# Altium PCB PCB.PcbDoc
Units mm, origin at the board's own origin, x right, y up, seen from the top; angles counter-clockwise.
Board outline 53.47 x 68.58 mm, 2 copper layers (Top Layer, Bottom Layer); 57 components, 52 nets, 216 pads, 0 vias.
Unrouted connection lines stored in the file: 149.
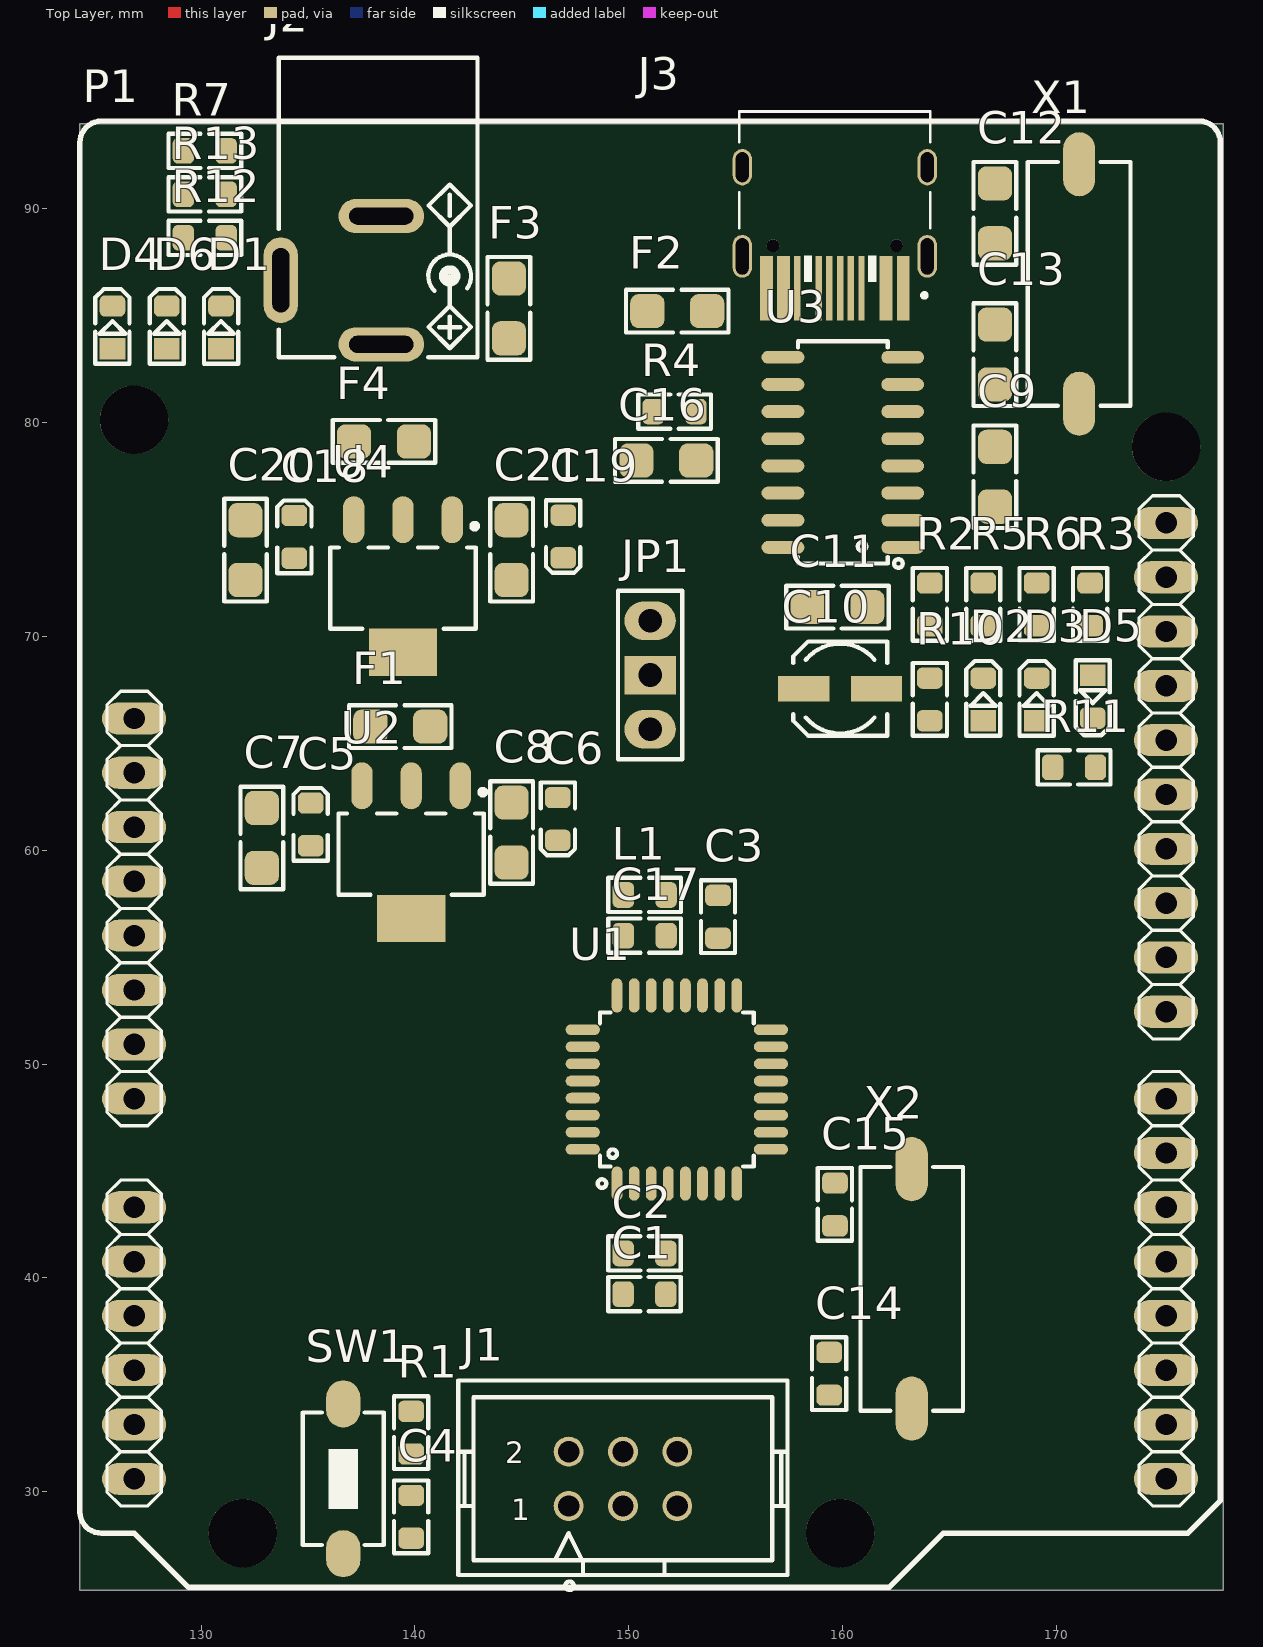
[diagram p0: Top Layer view]
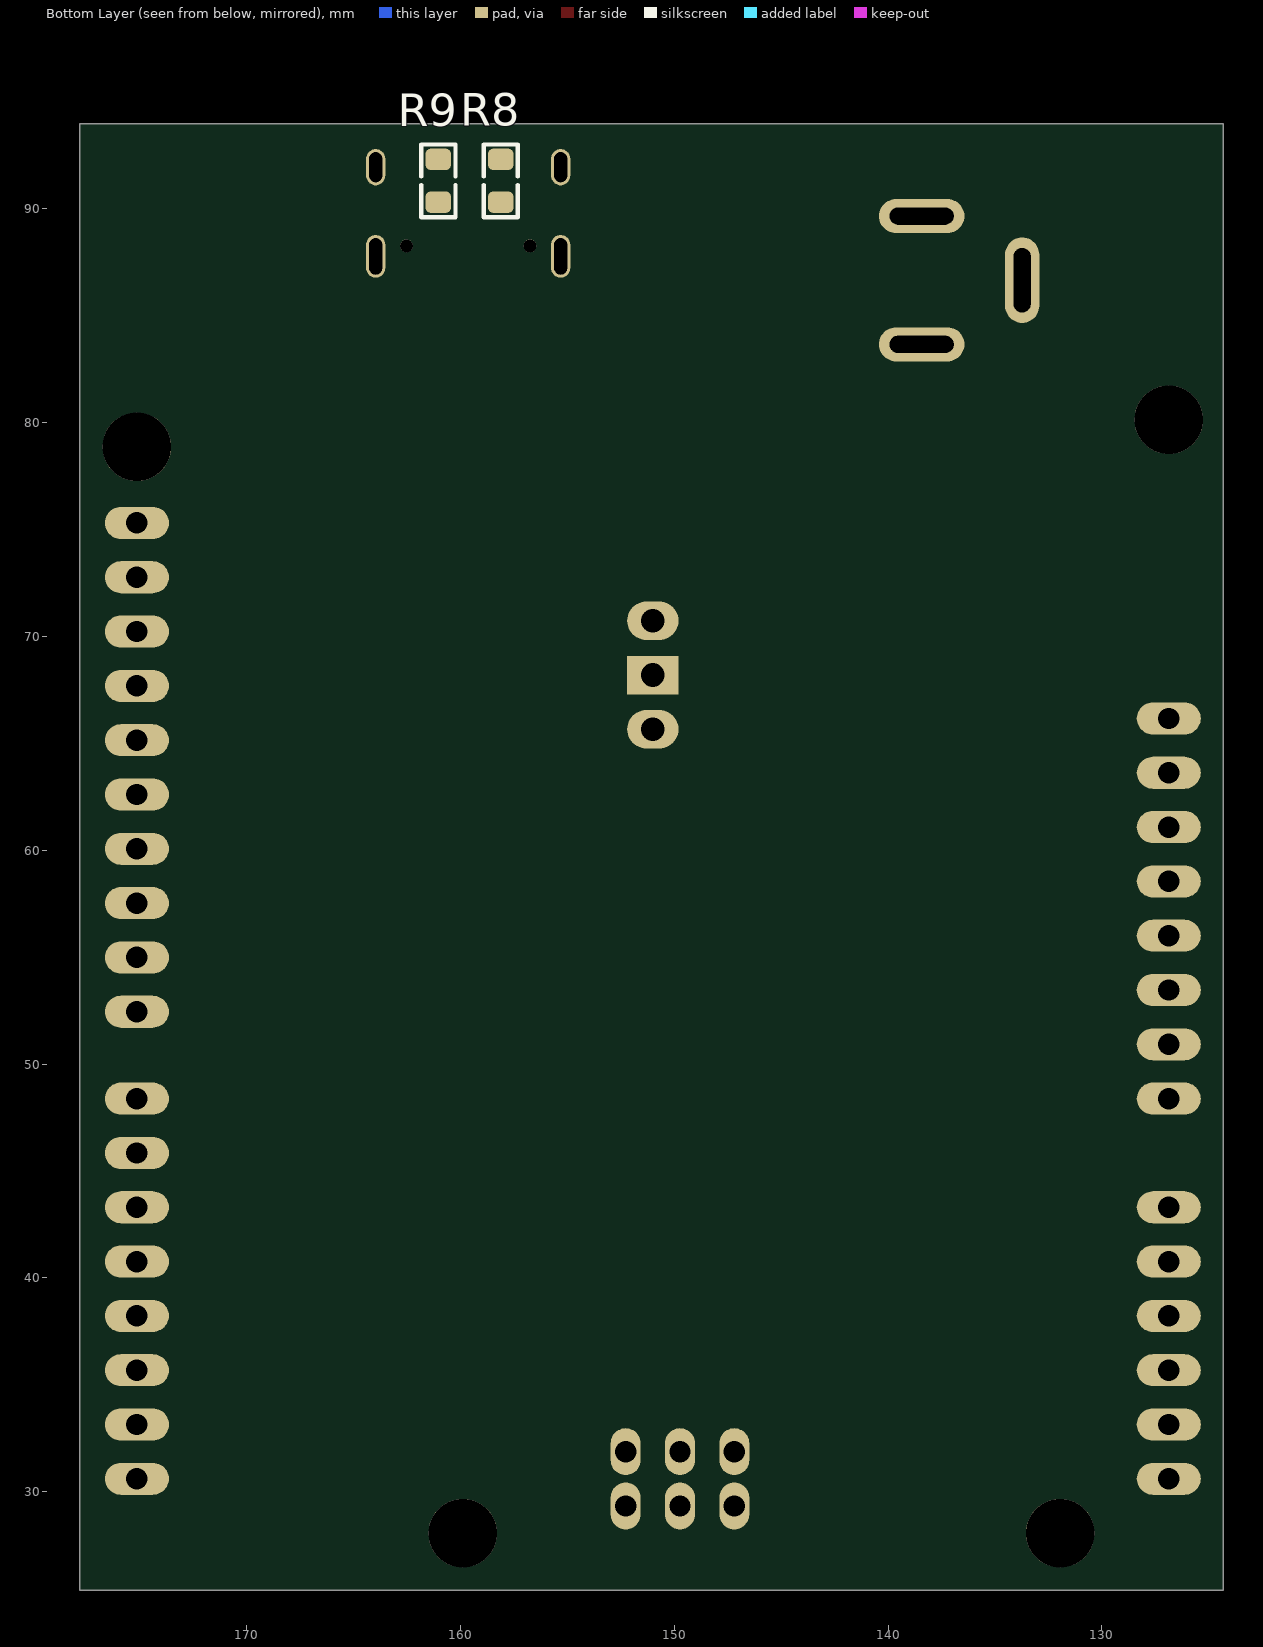
[diagram p1: Bottom Layer view, seen from below]

## Layer stack, top to bottom
Top Solder: solder mask 0.0102, Solder Resist, Dk 3.5
Top Layer: signal copper 0.0356
Dielectric 1: dielectric 0.32, FR-4, Dk 4.8
Bottom Layer: signal copper 0.0356
Bottom Solder: solder mask 0.0102, Solder Resist, Dk 3.5

## Board outline
124.333,25.4 177.8,25.4 177.8,93.98 124.333,93.98

## Design rules (kind name [scope] priority, off if disabled: settings)
Clearance [All] p1: gap=0.127 ignorepadtopadclearanceinfootprint=FALSE
ComponentClearance [All] p1 off: gap=0.254 collisioncheckmode=3 verticalgap=0.254 showdistances=FALSE
PolygonConnect [All] p1: connectstyle=Relief reliefconductorwidth=0.254 reliefentries=4 polygonreliefangle="90 Angle" airgapwidth=0.254
RoutingVias [All] p1: holewidth=0.711 width=1.27 viastyle="Through Hole" minholewidth=0.711 minwidth=1.27 maxholewidth=0.711 maxwidth=1.27
SolderMaskExpansion [All] p1: expansion=0.102 istentingtop=FALSE
Width [All] p1: maxlimit=0.254 minlimit=0.254 preferedwidth=0.254
29 further rules are at their usual default settings.

## Components (designator, comment, footprint, x,y, rotation, side; value= is the part's Value field where it differs from the comment)
C1 "100nF" C0805 150.741,39.243 r0 top
C2 "100nF" C0805 150.741,41.148 r0 top
C3 "100nF" C0805 154.178,56.896 r270 top
C4 "100nF" C0805 139.827,28.829 r90 top
C5 "10uF" C_TN_2012 135.128,61.214 r270 top
C6 "22uF" C_TN_2012 146.685,61.468 r90 top
C7 "100nF" C1206 132.842,60.579 r90 top
C8 "100nF" C1206 144.526,60.833 r270 top
C9 "10nF" C1206 167.132,77.47 r90 top
C10 "10uF" C_EL_D4L5 159.893,67.564 r0 top
C11 "100nF" C1206 159.766,71.374 r180 top
C12 "22pF" C1206 167.132,89.789 r270 top
C13 "22pF" C1206 167.132,83.185 r90 top
C14 "22pF" C0805 159.377,35.524 r90 top
C15 "22pF" C0805 159.646,43.439 r270 top
C16 "100nF" C1206 151.762,78.232 r0 top
C17 "100nF" C0805 150.749,56.007 r0 top
C18 "10uF" C_TN_2012 134.366,74.66 r270 top
C19 "22uF" C_TN_2012 146.939,74.676 r90 top
C20 "100nF" C1206 132.08,74.041 r90 top
C21 "100nF" C1206 144.526,74.041 r270 top
D1 "LED805YLW" LED0805YLW 130.937,84.455 r90 top
D2 "RED" LED0805RED 166.582,67.056 r90 top
D3 "RED" LED0805RED 169.079,67.056 r90 top
D4 "LED805GRN" LED0805GRN 125.857,84.455 r90 top
D5 "LED805GRN" LED0805GRN 171.704,67.183 r270 top
D6 "LED805RED" LED0805RED 128.397,84.455 r90 top
F1 "FUSE3A_1206" F1206 139.319,65.786 r180 top
F2 "500mA" F1206 152.273,85.217 r180 top
F3 "FUSE3A_1206" F1206 144.399,85.344 r270 top
F4 "FUSE3A_1206" F1206 138.557,79.121 r180 top
J1 "CONN_ISP" IDC_2X3 149.733,30.607 r0 top
J2 "DC_POWER_JACK" JAC_PWR2 138.43,83.662 r0 top
J3 "12b" "HRO_TYPE-C-31-M-12 - Extended" 159.639,91.948 r180 top
JP1 "0b" "jumper selector" 151.003,70.739 r270 top
L1 "100nH" L0805 150.749,57.912 r0 top
P1 "UNO" ARDUINO_UNO_CONNECTOR 126.873,80.137 r270 top locked
R1 "10K" R0805 139.827,32.766 r270 top
R2 "1K" R0805 164.084,71.501 r270 top
R3 "1K" R0805 171.577,71.501 r270 top
R4 "10K" R0805 152.146,80.518 r0 top
R5 "680b" R0805 166.582,71.501 r270 top
R6 "680b" R0805 169.079,71.501 r270 top
R7 "220b" R0805 130.175,92.71 r180 top
R8 "4.7K" R0805 158.115,91.313 r270 bottom
R9 "4.7K" R0805 161.036,91.313 r270 bottom
R10 "1.8K" R0805 164.084,67.056 r90 top
R11 "1k" R0805 170.831,63.881 r0 top
R12 "1.8k" R0805 130.175,88.646 r180 top
R13 "680b" R0805 130.175,90.678 r180 top
SW1 "PUSHBUTTON" SWPBS_SPST_6X3X2 136.652,30.607 r90 top
U1 "ATMEGA328" QFG80_32 152.254,48.813 r90 top
U2 "LD1117" SOT223_4 139.827,59.817 r270 top
U3 "CH340G" SO_16 160.014,78.613 r180 top
U4 "LD1117" SOT223_4 139.446,72.263 r270 top
X1 "12MHz" XTL_2_11X5 171.069,86.487 r270 top
X2 "16MHz" XTL_2_11X5 163.239,39.488 r90 top

## Footprints (in the part's own frame and the unit in brackets; to place one, negate y for a bottom-side part, rotate by r counter-clockwise, add the part's x,y. Pads: shape width x height; smd on the part's side, far side on the other; paste and mask are expansions set on the pad)
ARDUINO_UNO_CONNECTOR [mm] "Arduino Uno Connector"
  oval 1.5x3 hole 1: AD1(36.83,0) AD2(39.37,0) AD3(41.91,0) AD4(44.45,0) AD5(46.99,0) AD6(49.53,0) IOH1(27.686,48.26) IOH2(25.146,48.26) IOH3(22.606,48.26) IOH4(20.066,48.26) IOH5(17.526,48.26) IOH6(14.986,48.26) IOH7(12.446,48.26) IOH8(9.906,48.26) IOH9(7.366,48.26) IOH10(4.826,48.26) IOL1(49.53,48.26) IOL2(46.99,48.26) IOL3(44.45,48.26) IOL4(41.91,48.26) IOL5(39.37,48.26) IOL6(36.83,48.26) IOL7(34.29,48.26) IOL8(31.75,48.26) POW1(13.97,0) POW2(16.51,0) POW3(19.05,0) POW4(21.59,0) POW5(24.13,0) POW6(26.67,0) POW7(29.21,0) POW8(31.75,0)
  round 3.2 hole 3.2: H1(0,0) H2(52.07,5.08) H3(52.07,33.02) H4(1.27,48.26)
  silkscreen extent -13.97,-2.54 54.61,50.8, body extent 3.31,-1.15 51.13,49.54, height 8.55
C0805 [mm] "CHIP Capacitor, 2.0X1.3mm, 0805"
  rrect50% 1x1.2 smd paste-0.1 mask+0.075: 1(-1,0) 2(1,0)
  Top Layer pour cut-out: -0.5,0.8 0.5,0.8 0.5,-0.8 -0.5,-0.8
  silkscreen extent -1.7,-0.8 1.7,0.8, body extent -1,-0.62 1,0.63, height 1
C1206 [mm] "CHIP Capacitor, 3.2X1.6mm, 1206"
  rrect50% 1.6x1.6 smd paste-0.8 mask+0.075: 1(-1.4,0) 2(1.4,0)
  Top Layer pour cut-out: -0.8,1 -0.8,-1 0.8,-1 0.8,1
  silkscreen extent -2.4,-1 2.4,1, body extent -1.6,-0.8 1.6,0.8, height 1
C_EL_D4L5 [mm] "Electrolytic Cap, D: 4.3mm, Size B, 5.5mm Height"
  rect 2.4x1.2 smd paste-0.129: 1(-1.7,0) 2(1.7,0)
  Top Layer pour cut-out: 1.397,2.032 1.397,-2.032 -1.651,-2.032 -1.651,2.032
  silkscreen extent -2.2,-2.2 2.2,2.2, body extent -2.5,-2.15 2.5,2.15, height 5.5
C_TN_2012 [mm] "CAPACITOR, TAN N, TAN P, TAN R, 0805P, 2X1.3mm"
  rrect50% 1x1.2 smd paste-0.089 mask+0.075: 1(-1,0) 2(1,0)
  Top Layer pour cut-out: -0.5,0.8 0.5,0.8 0.5,-0.8 -0.5,-0.8
  silkscreen extent -1.7,-0.8 1.7,0.8, body extent -1.04,-0.69 1.21,0.66, height 1.35
F1206 [mm] "FUSE, 1206, 3.2x1.6mm"
  rrect50% 1.6x1.6 smd paste-2 mask+0.075: 1(-1.4,0) 2(1.4,0)
  Top Layer pour cut-out: -0.8,1 -0.8,-1 0.8,-1 0.8,1
  silkscreen extent -2.4,-1 2.4,1, body extent -1.6,-0.8 1.6,0.8, height 1
"HRO_TYPE-C-31-M-12 - Extended" [mm]
  rect 0.6x3 smd mask+0.05: A1_B12(-3.2,5.664) A4_B9(-2.4,5.664) B1_A12(3.2,5.664) B4_A9(2.4,5.664)
  rect 0.3x3 smd mask+0.05: A5(-1.25,5.664) A6(-0.25,5.664) A7(0.25,5.664) B5(1.75,5.664) B6(0.75,5.664) B7(-0.75,5.664)
  oval 0.9x2 hole 0.6 slot 1.7 at 90 deg: S1(-4.325,4.17) S2(4.325,4.17)
  oval 0.9x1.7 hole 0.6 slot 1.4 at 90 deg: S3(-4.325,0) S4(4.325,0)
  round 0.6 hole 0.6 unplated: ""(-2.89,3.68) ""(2.89,3.68)
  silkscreen extent -4.47,-2.6 4.47,6.09, body extent -4.47,-2.6 4.47,5.31, height 3.31
IDC_2X3 [mm]
  round 1.4 / inner round 1.4 / far side oval 1.4x2.2 hole 1 mask+0.1: 1(-2.54,-1.27) 2(-2.54,1.27) 3(0,-1.27) 4(0,1.27) 5(2.54,-1.27) 6(2.54,1.27)
  silkscreen extent -7.7,-5.2 7.7,4.6, body extent -7.64,-4.42 7.64,4.75, height 9.13
JAC_PWR2 [mm] "DC POWER JACK, Power Jack KLDX-0202"
  oval 4x1.6 hole 0.8 slot 3 at 0 deg: 1(0,0) 2(0,6)
  oval 1.6x4 hole 0.8 slot 3 at 90 deg: 3(-4.7,3)
  silkscreen extent -4.8,-0.6 4.5,13.4, body extent -4.9,-0.65 4.5,13.85, height 10.8
"jumper selector" [mm]
  oval 1.8x2.4 hole 1.1: 1(0,0) 3(5.08,0)
  rect 1.8x2.4 hole 1.1: 2(2.54,0)
  silkscreen extent -1.4,-1.5 6.48,1.5, body extent -1.24,-1.27 6.38,1.27, height 10.16
L0805 [mm] "INDUCTOR, FERRITE BEAD, 0805, 2.0X1.3mm"
  rrect50% 1x1.2 smd paste-0.1 mask+0.075: 1(-1,0) 2(1,0)
  Top Layer pour cut-out: -0.5,0.8 0.5,0.8 0.5,-0.8 -0.5,-0.8
  silkscreen extent -1.7,-0.8 1.7,0.8, body extent -1,-0.6 1,0.6, height 0.95
LED0805GRN [mm] "LED SMD 0805, GREEN"
  rect 1x1.2 smd paste-2 mask+0.075: 1(-1,0)
  rrect50% 1x1.2 smd paste-2 mask+0.075: 2(1,0)
  Top Layer pour cut-out: -0.5,0.8 0.5,0.8 0.5,-0.8 -0.5,-0.8
  silkscreen extent -1.7,-0.8 1.8,0.8, body extent -1,-0.63 1,0.63, height 0.7
LED0805RED [mm] "LED SMD 0805, RED"
  rect 1x1.2 smd paste-2 mask+0.075: 1(-1,0)
  rrect50% 1x1.2 smd paste-2 mask+0.075: 2(1,0)
  Top Layer pour cut-out: -0.5,0.8 0.5,0.8 0.5,-0.8 -0.5,-0.8
  silkscreen extent -1.7,-0.8 1.8,0.8, body extent -1,-0.63 1,0.63, height 0.7
LED0805YLW [mm] "LED SMD 0805, YELLOW"
  rect 1x1.2 smd paste-2 mask+0.075: 1(-1,0)
  rrect50% 1x1.2 smd paste-2 mask+0.075: 2(1,0)
  Top Layer pour cut-out: -0.5,0.8 0.5,0.8 0.5,-0.8 -0.5,-0.8
  silkscreen extent -1.7,-0.8 1.8,0.8, body extent -1,-0.63 1,0.63, height 0.7
QFG80_32 [mm] "TQFP32, A32 (Cypress), GP32 (Zarlink), MS-026ABA(JEDEC), 7X7mm, 0.8mm"
  oval 1.6x0.5 smd: 1(-4.4,2.8) 2(-4.4,2) 3(-4.4,1.2) 4(-4.4,0.4) 5(-4.4,-0.4) 6(-4.4,-1.2) 7(-4.4,-2) 8(-4.4,-2.8) 17(4.4,-2.8) 18(4.4,-2) 19(4.4,-1.2) 20(4.4,-0.4) 21(4.4,0.4) 22(4.4,1.2) 23(4.4,2) 24(4.4,2.8)
  oval 0.5x1.6 smd: 9(-2.8,-4.4) 10(-2,-4.4) 11(-1.2,-4.4) 12(-0.4,-4.4) 13(0.4,-4.4) 14(1.2,-4.4) 15(2,-4.4) 16(2.8,-4.4) 25(2.8,4.4) 26(2,4.4) 27(1.2,4.4) 28(0.4,4.4) 29(-0.4,4.4) 30(-1.2,4.4) 31(-2,4.4) 32(-2.8,4.4)
  silkscreen extent -4.6,-3.6 3.6,3.7, body extent -4.5,-4.5 4.5,4.5, height 1.6
R0805 [mm] "CHIP RESISTOR 1/8 WATT ,2.0X1.3mm, 0805, 2012"
  rrect50% 1x1.2 smd paste-0.1 mask+0.075: 1(-1,0) 2(1,0)
  Top Layer pour cut-out: -0.5,0.8 0.5,0.8 0.5,-0.8 -0.5,-0.8
  silkscreen extent -1.7,-0.8 1.7,0.8, body extent -1.15,-0.67 1.15,0.68, height 0.76
SO_16 [mm] "SOP, SOIC, 3.9mm width, 1.27mm pitch,"
  oval 2x0.6 smd: 1(-2.8,4.445) 2(-2.8,3.175) 3(-2.8,1.905) 4(-2.8,0.635) 5(-2.8,-0.635) 6(-2.8,-1.905) 7(-2.8,-3.175) 8(-2.8,-4.445) 9(2.8,-4.445) 10(2.8,-3.175) 11(2.8,-1.905) 12(2.8,-0.635) 13(2.8,0.635) 14(2.8,1.905) 15(2.8,3.175) 16(2.8,4.445)
  silkscreen extent -2.8,-5.2 2.1,5.4, body extent -3.1,-4.95 3.1,4.95, height 1.7
SOT223_4 [mm] "SOT223, 4-Leads, Body 6.5x3.5mm, Pitch 2.30mm"
  oval 2.2x1 smd: 1(-3.2,2.3) 2(-3.2,0) 3(-3.2,-2.3)
  rect 2.2x3.2 smd paste-5: 4(3,0)
  Top Layer pour cut-out: -1.7,3.556 1.7,3.556 1.7,-3.556 -1.7,-3.556
  silkscreen extent -3.02,-3.4 1.9,3.48, body extent -3.5,-3.25 3.5,3.25, height 1.7
SWPBS_SPST_6X3X2 [mm] "SWITCH, PUSHBUTTON, SMD, SPST, 6X3.5X2.5mm, RS-282G05A3, SKQYPA, 50000 Cycles"
  oval 2.2x1.6 smd mask+0.1: 1(-3.5,0) 2(3.5,0)
  silkscreen extent -3.1,-1.9 3.1,1.9, body extent -3.4,-1.86 3.4,1.86, height 2.5
XTL_2_11X5 [mm] "SMD crystal resonator, ABL, ABLS, HC-49, HC49 11X4.5MM"
  oval 3x1.5 smd: 1(-5.6,0) 2(5.6,0)
  silkscreen extent -5.7,-2.4 5.7,2.4, body extent -6.4,-2.41 6.4,2.42, height 4.3

## Part data
C1 C2 C3 C4 C14 C15 C17: library part CAP_SMD_MLCC_0805, "CAP, MLCC", ASSEMBLY=ASSEMBLY, MANF=-, MANF_P#=MANF_PART#, PARAM="-, -%", PARAM2=-V, PRICE="100= 1$"
C5 C6 C18 C19: library part CAP_SMD_TAN, "CAP, SMD, TAN", MANF=VISHAY, MANF_P#=T55A106M6R3C0300, PARAM="20%, 300mOhm, -55~105oC", PARAM2=6.3V, PRICE=0.46$
C7 C8 C20 C21: library part CAP_SMD_MLCC_1206, "CAP, MLCC", ASSEMBLY=ASSEMBLY, MANF=-, MANF_P#=MANF_PART#, PARAM="-, -%", PARAM2=-V, PRICE="100= 1$"
C9 C11 C12 C13 C16: library part CAP_SMD_FILM, "CAP, FILM, 680nF, 16V, Acryl, 20%, 1206", ASSEMBLY=ASSEMBLY, DESC=-, MANF=Murata, MANF_P#=-, PARAM="Acrylic, MetallizedStacked, 20%, -40~85oC", PARAM2=16V, PRICE="100= 40$"
C10: library part CAP_SMD_EL, "CAP, SMD, ELEC,", ASSEMBLY=ASSEMBLY, DESC=DESCRIPTION, DIST#=MOUSER, MANF=MANF, MANF_P#=MANF_PART#, PARAM=20%, PARAM2=-V, PRICE="10= -$"
D1: library part LED_SMD_0805_YLW, "LED, SMD, 0805, YELLOW", ASSEMBLY=ASSEMBLY, DESC=DESCRIPTION, MANF=MANF, MANF_P#=MANF_PART#, PARAM2=2.2V, PRICE=36t@Javan
D2 D3 D6: library part LED_SMD_0805_RED, "LED, SMD, 0805, RED", ASSEMBLY=ASSEMBLY, DESC=DESCRIPTION, MANF=MANF, MANF_P#=MANF_PART#, PARAM2=2.2V, PRICE=36t@Javan
D4 D5: library part LED_SMD_0805_GRN, "LED, SMD, 0805, GREEN", ASSEMBLY=ASSEMBLY, DESC=DESCRIPTION, MANF=-, MANF_P#=-, PARAM=20mA, PARAM2=2.2V, PRICE=36t@Javan
F1 F2 F3 F4: library part FUSE_3A_1206_SLOW, "Fuse, 3A, 32VDC, 1206, SMD, Slow Blow", MANF=Bourns, MANF_P#=SF-1206SP300-2, PARAM2=0.027Ohm, PRICE=0.9$
  F1 F4: PARAM=0.5A
  F2: PARAM="3A; 32VDC; Slow Blow"
  F3: PARAM=2A
J1: library part CONN_AVR_ISP_IDC6, "CONN, ISP, AVR , HEADER BOX"
J2: library part CONN_PWR_JACKR2, "CONN, PWR JACK DC, PLUG DIAM 2.0MM RA THD", MANF="CUI STACK", MANF_P#="PJ-202A, PJ-002AH, PJ-102AH, KLDX-0202"
J3: library part Con_USB_C, "USB C Female Connector", Package=SMD, Rating=Rating?, Inflow=inflow?, Type=C, Validation=Valid
JP1: library part SW_Other_JSelector_Dip, "Jumper Selector", Package=Dip, Rating=Rating?, Inflow=5145, Type=Selector, Validation=NT
L1: library part IND_SMD_330nH_0.2A, "INDUCTOR, SMD", MANF="EPCOS / TDK", MANF_P#=B82498F3331J, PARAM="220mA, 1.5Ohm, -55~105oC", PRICE=0.8$
P1: library part Con_Arduino_UNO_Con, "Arduino UNO Connector", Package=Package?, Rating=Rating?, Inflow=inflow?, Type=Type?, Validation=NT
R1 R2 R3 R4 R5 R6 R7 R8 R9 R10 R11 R12 R13: library part RES_SMD_0805, "RESISTOR, SMD", ASSEMBLY=ASSEMBLY, DESC=DESCRIPTION, DIST#=MOUSER, MANF=-, MANF_P#=-, PARAM=-W, PARAM2=1%, PRICE="100= 0.5$"
SW1: library part SWPBS_SPST_6X3X2_RS282, "SWITCH, PUSH BUTTON, TACTILE, SMD, SPST, 6X3.5X2.5mm", ASSEMBLY=ASSEMBLY, DESC=DESCRIPTION, MANF=C&K, MANF_P#="RS-282G05A3-SM RT", PARAM=PARAM, PRICE=0.8$
U1: library part ATMEGA328_QFP32, "MCU, AVR, 8-Bit, 16KB, 1KB RAM, 20MHz", DESC="1KB EEPROM", MANF=ATMEL/MICROCHIP, MANF_P#=ATMEGA328-AU, PARAM="32KB, 2KB RAM, 20MHz, -40~85°C", PARAM2=1.8~5.5V, PART#ALT=ATmega8-48-88-168-328, PRICE=2.2$
U2 U4: library part VREG_1117_SOT223, "REG, Linear, LDO1V, 0.8A, SOT-223", MANF="TI, ON, ST", MANF_P#="LD1117, LM1117, AMS1117, TLV1117, REG1117, NCP1117, LT1117, SPX1117", PARAM="LDO1V, 0.8A", PARAM2=1.2/1.5/1.8/2.5/2.85/3.3/5V
U3: library part CH340G_SOP16, "USB-UART", MANF_P#=CH340G
X1: library part XTL_2_HC49_8MHz_SMD, "Crystal MOST POPULAR ABL HC49 PACKAGE", MANF=ABRACON, MANF_P#=ABLS-8.000MHZ-B4-T, PARAM="8MHz, 18pF, 30PPM, -20~70oC", PRICE=0.3$
X2: library part XTL_2_HC49_SMD, "Crystal MOST POPULAR ABL HC49 PACKAGE"

## Nets (pads, with @x,y where several pads share a name; then routed paths per layer and width w, separated by ;. In a path a pad name is that pad's centre, name@x,y a point inside that pad or via, vN(x,y) a via of type N, cw(c..) or ccw(c..) an arc to the next point about the centre after c; other vN are vias at no path point)
+3.3: C1.2 C2.2 C3.2 C6.1 C8.2 D4.1 L1.1 P1.POW4 R1.1 U1.4 U1.6 U1.18 U2.2 U2.4
+5: C10.1 C11.2 C19.1 C21.2 D2.1 D3.1 D6.1 JP1.1 P1.POW5 U3.16 U4.2 U4.4
ADC6: U1.19
ADC7: U1.22
ARef: C17.2 L1.2 P1.IOH8 U1.20
GND: C1.1 C2.1 C3.1 C4.1 C5.2 C6.2 C7.1 C8.1 C9.1 C10.2 C11.1 C12.1 C13.1 C14.1 C15.1 C17.1 C18.2 C19.2 C20.1 C21.1 J1.6 J2.2 J2.3 J3.A1_B12 J3.B1_A12 J3.S1 J3.S2 J3.S3 J3.S4 P1.IOH7 P1.POW6 P1.POW7 R4.1 R7.1 R8.1 R9.1 R10.1 R11.1 R12.1 R13.1 SW1.1 U1.3 U1.5 U1.21 U2.1 U3.1 U4.1
NetC5_1: C5.1 C7.2 F1.2 U2.3
NetC9_2: C9.2 U3.4
NetC12_2: C12.2 U3.8 X1.1
NetC13_2: C13.2 U3.7 X1.2
NetC16_2: C16.2 R4.2 U3.13
NetC18_1: C18.1 C20.2 F4.2 U4.3
NetD1_2: D1.2 R12.2
NetD2_2: D2.2 R5.2
NetD3_2: D3.2 R6.2
NetD4_2: D4.2 R7.2
NetD5_2: D5.2 R11.2
NetD6_2: D6.2 R13.2
NetF1_1: F1.1 JP1.2
NetF2_1: F2.1 J3.A4_B9 J3.B4_A9
NetF3_1: F3.1 J2.1
NetJ3_A5: J3.A5 R9.2
NetJ3_A6: J3.A6 J3.B6 U3.5
NetJ3_A7: J3.A7 J3.B7 U3.6
NetJ3_B5: J3.B5 R8.2
NetR2_1: R2.1 R5.1 U3.2
NetR3_1: R3.1 R6.1 U3.3
PB0: P1.IOH1 U1.12
PB1: P1.IOH2 U1.13
PB2: P1.IOH3 U1.14
PB3: J1.4 P1.IOH4 U1.15
PB4: J1.1 P1.IOH5 U1.16
PB5: D5.1 J1.3 P1.IOH6 U1.17
PB6: C14.2 U1.7 X2.1
PB7: C15.2 U1.8 X2.2
PC0: P1.AD1 U1.23
PC1: P1.AD2 U1.24
PC2: P1.AD3 U1.25
PC3: P1.AD4 U1.26
PC4: P1.AD5 P1.IOH9 U1.27
PC5: P1.AD6 P1.IOH10 U1.28
PD0: P1.IOL1 R2.2 R10.2 U1.30
PD1: P1.IOL2 R3.2 U1.31
PD2: P1.IOL3 U1.32
PD3: P1.IOL4 U1.1
PD4: P1.IOL5 U1.2
PD5: P1.IOL6 U1.9
PD6: P1.IOL7 U1.10
PD7: P1.IOL8 U1.11
Reset: C4.2 C16.1 J1.5 P1.POW3 R1.2 SW1.2 U1.29
Vin: D1.1 F3.2 F4.1 P1.POW8
Vusb: F2.2 JP1.3
pads on no net: J1.2 J3. P1.H1 P1.H2 P1.H3 P1.H4 P1.POW1 P1.POW2 U3.9 U3.10 U3.11 U3.12 U3.14 U3.15

## Text inside footprints (layer, text, board x,y; h text height)
J1: Top Overlay "2" at 144.221,31.344 h1; Top Overlay "1" at 144.501,28.677 h1
J3: Mechanical 13 "PCB EDGE" at 154.94,93.929 h0.61 r180